# EAGLE board low-gain-radio (EAGLE 7.3.0)
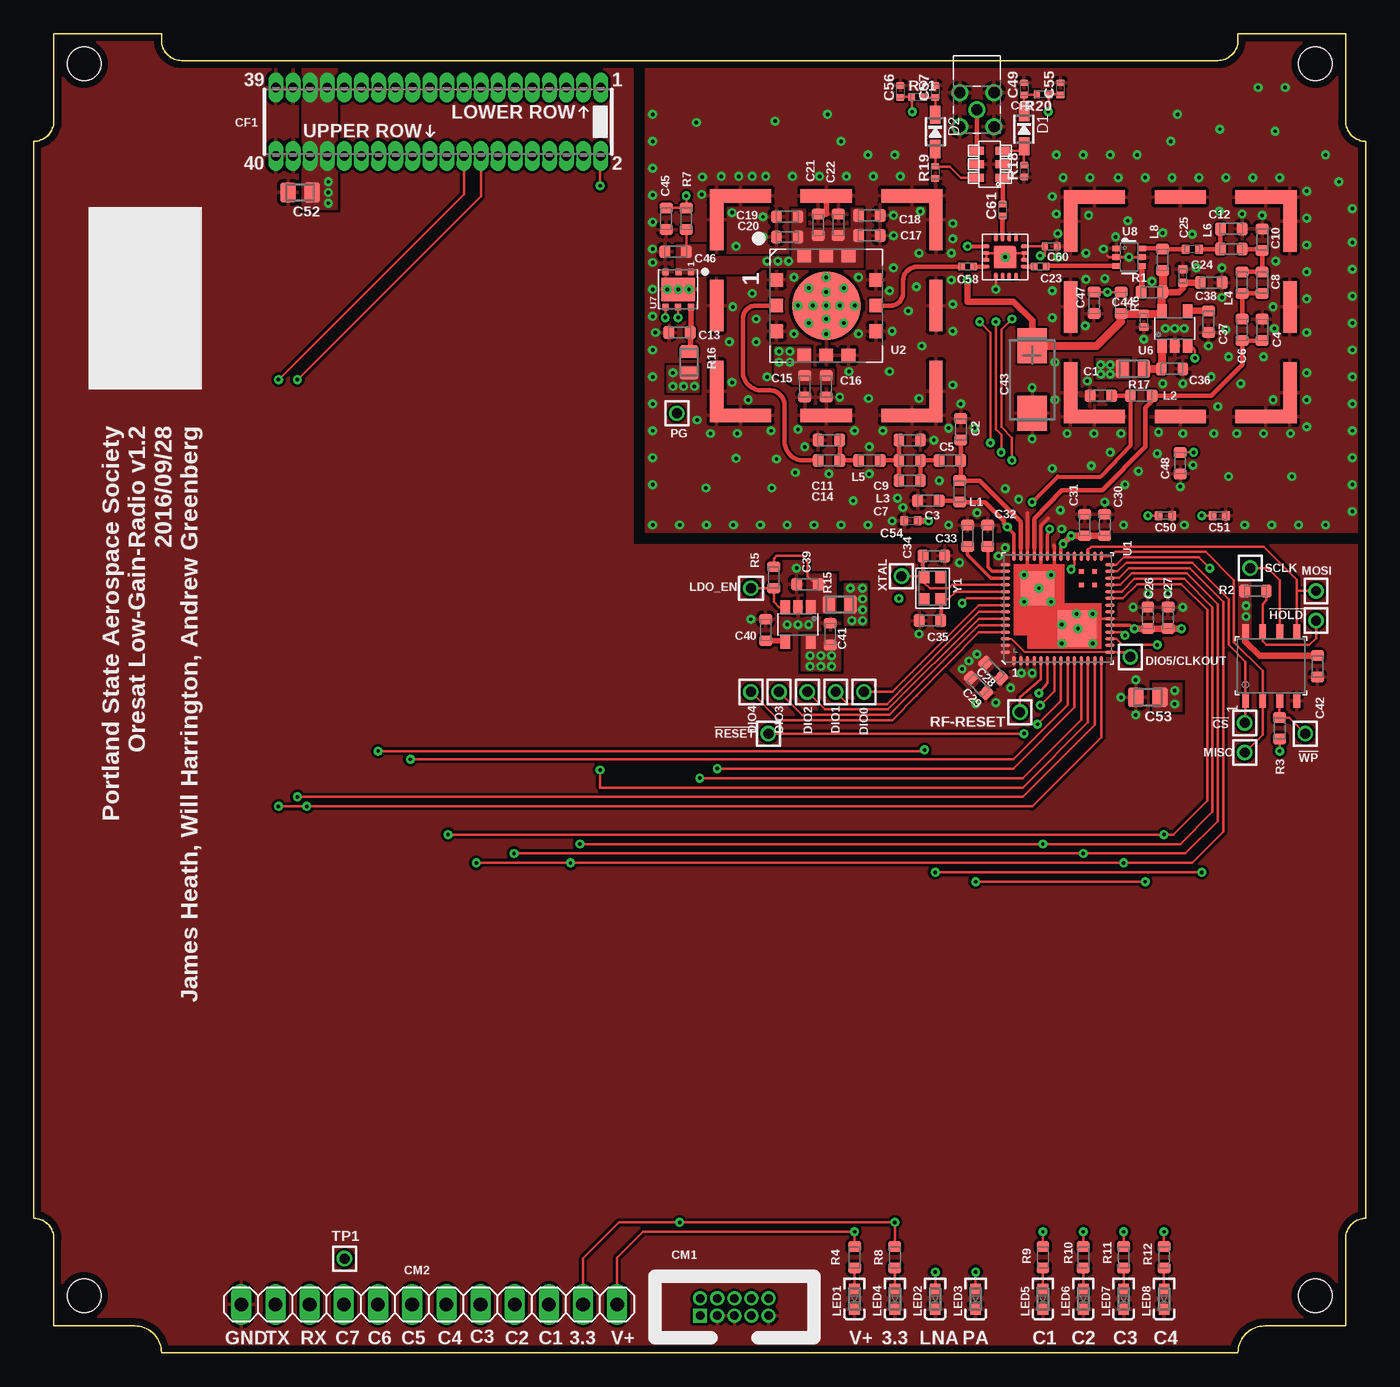
[diagram p0: board, top side]
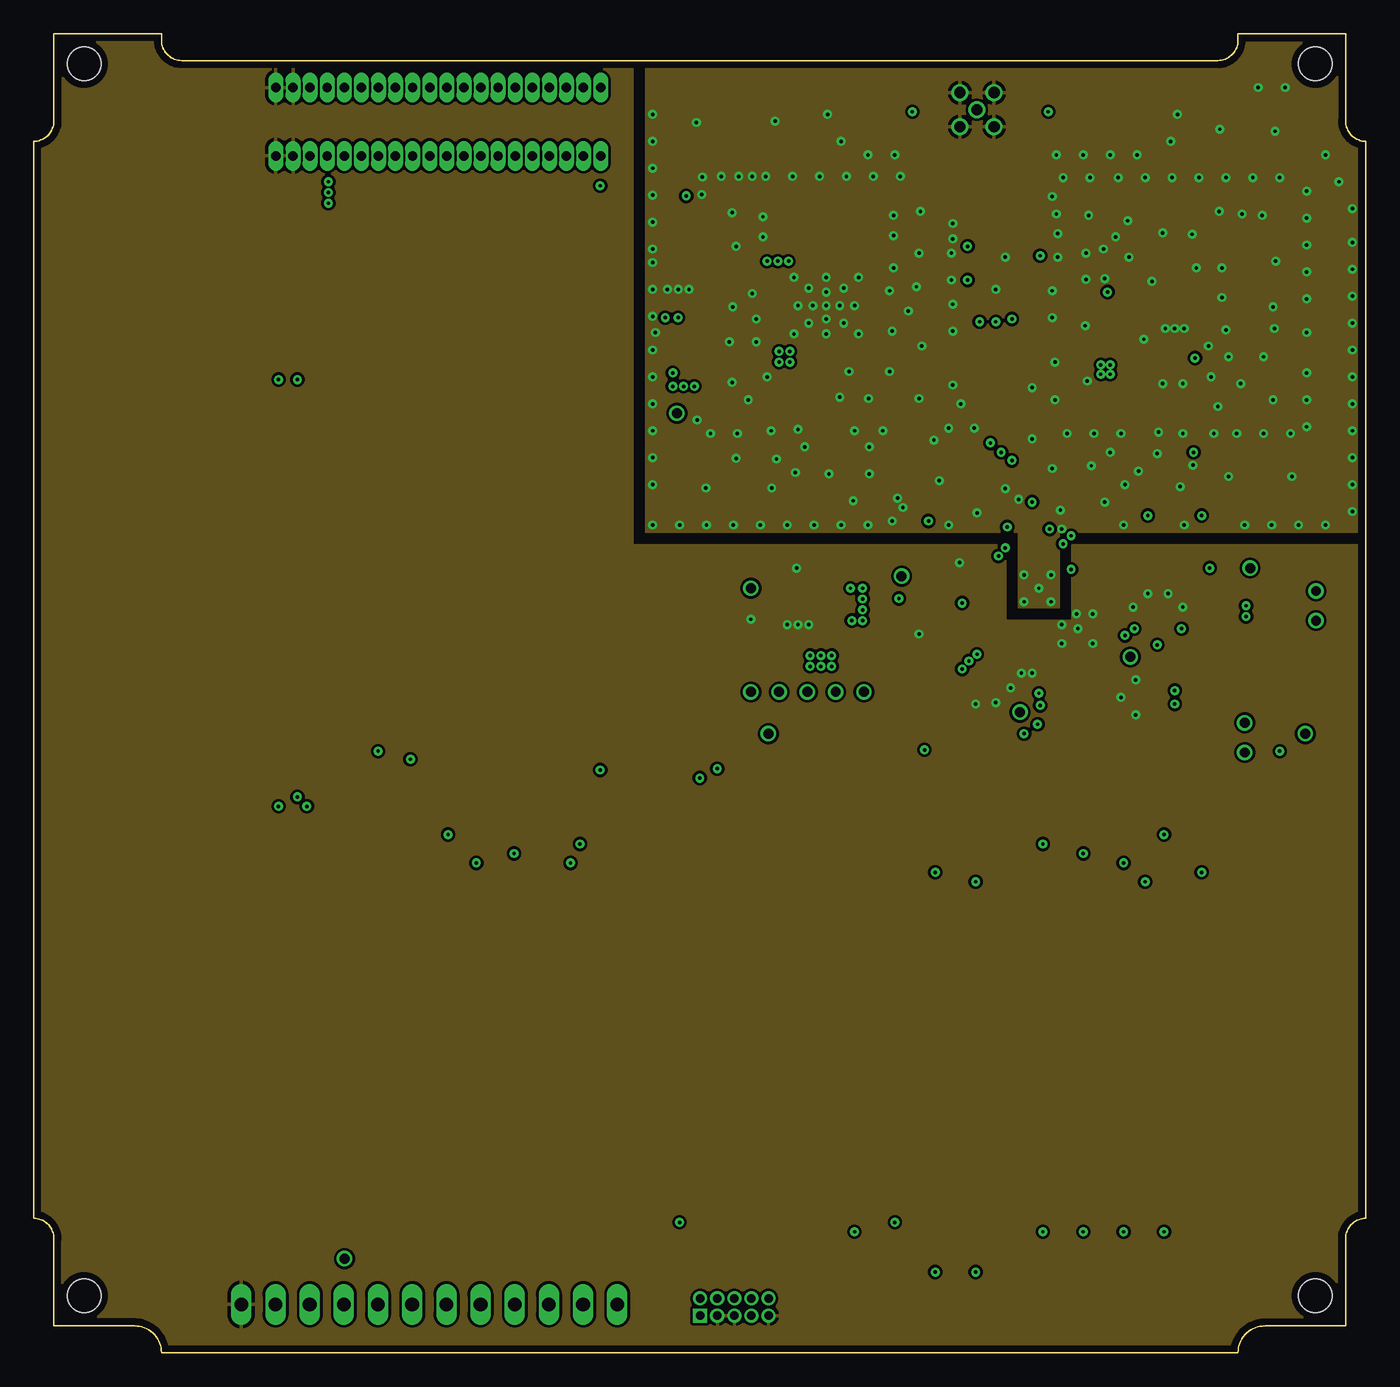
[diagram p1: board, inner layer Route2]
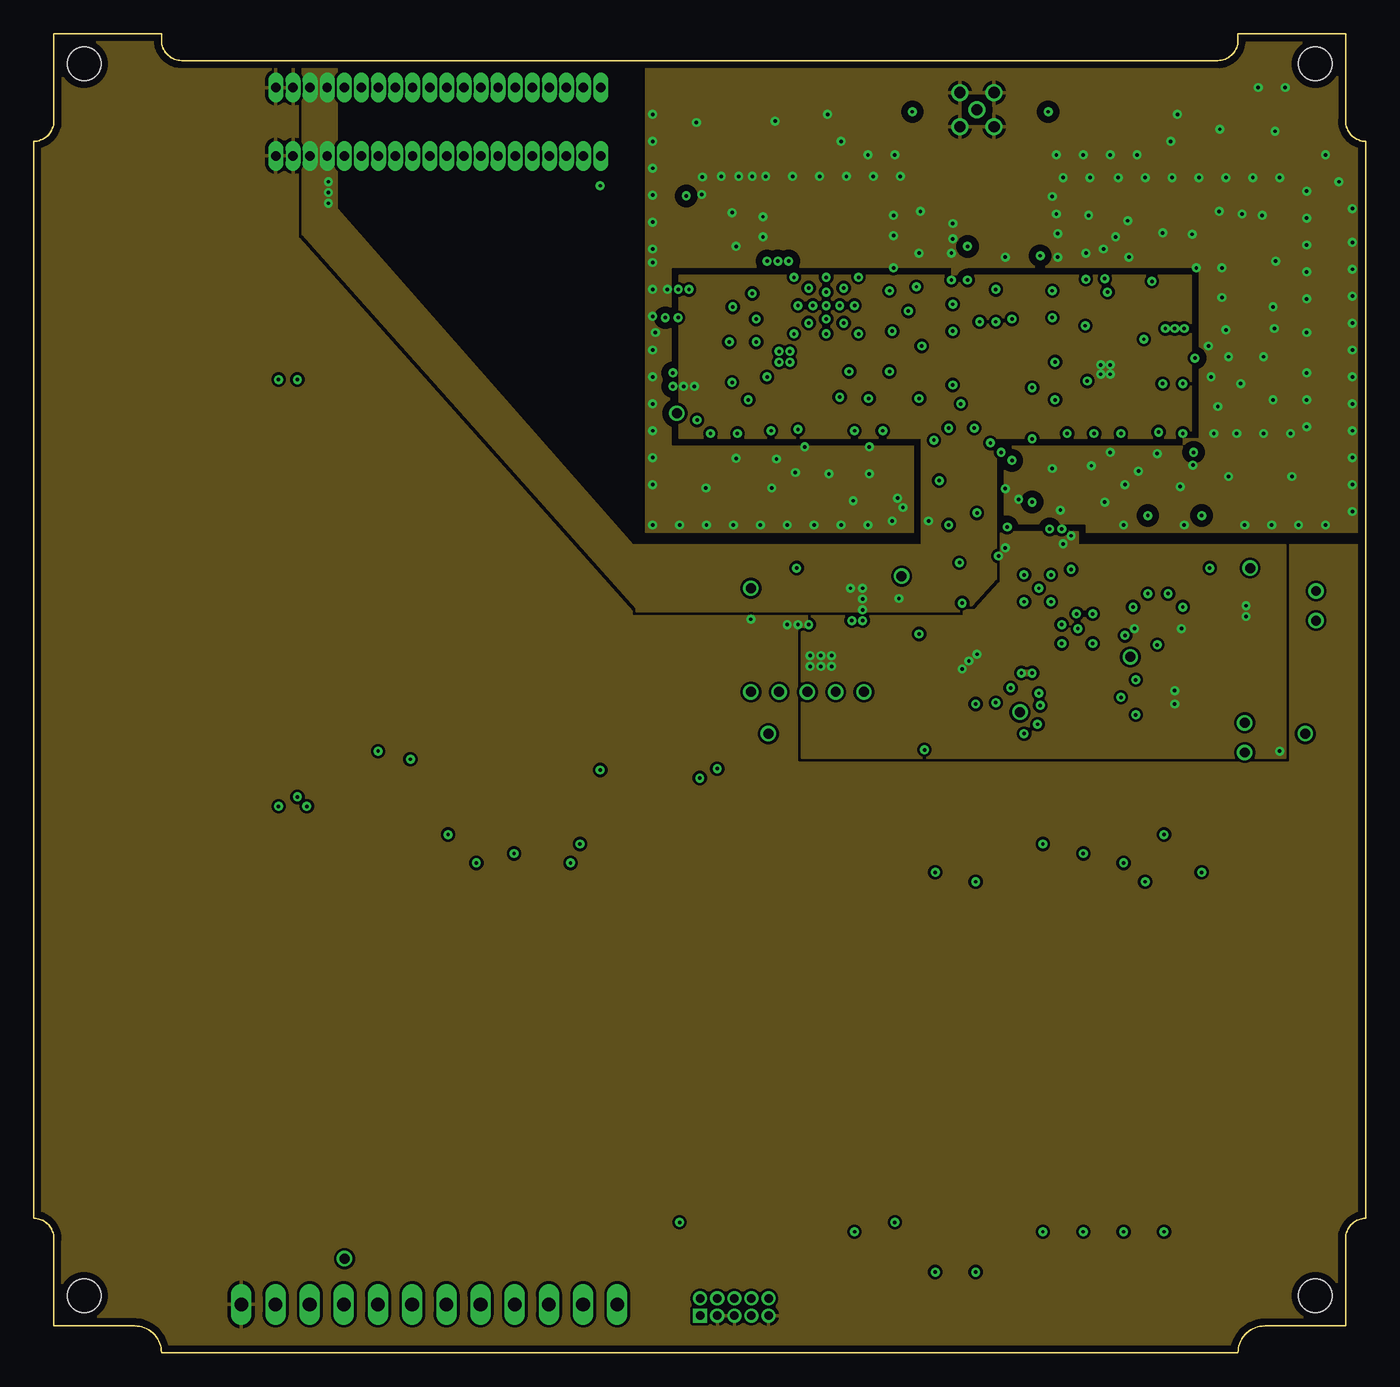
[diagram p2: board, inner layer Route15]
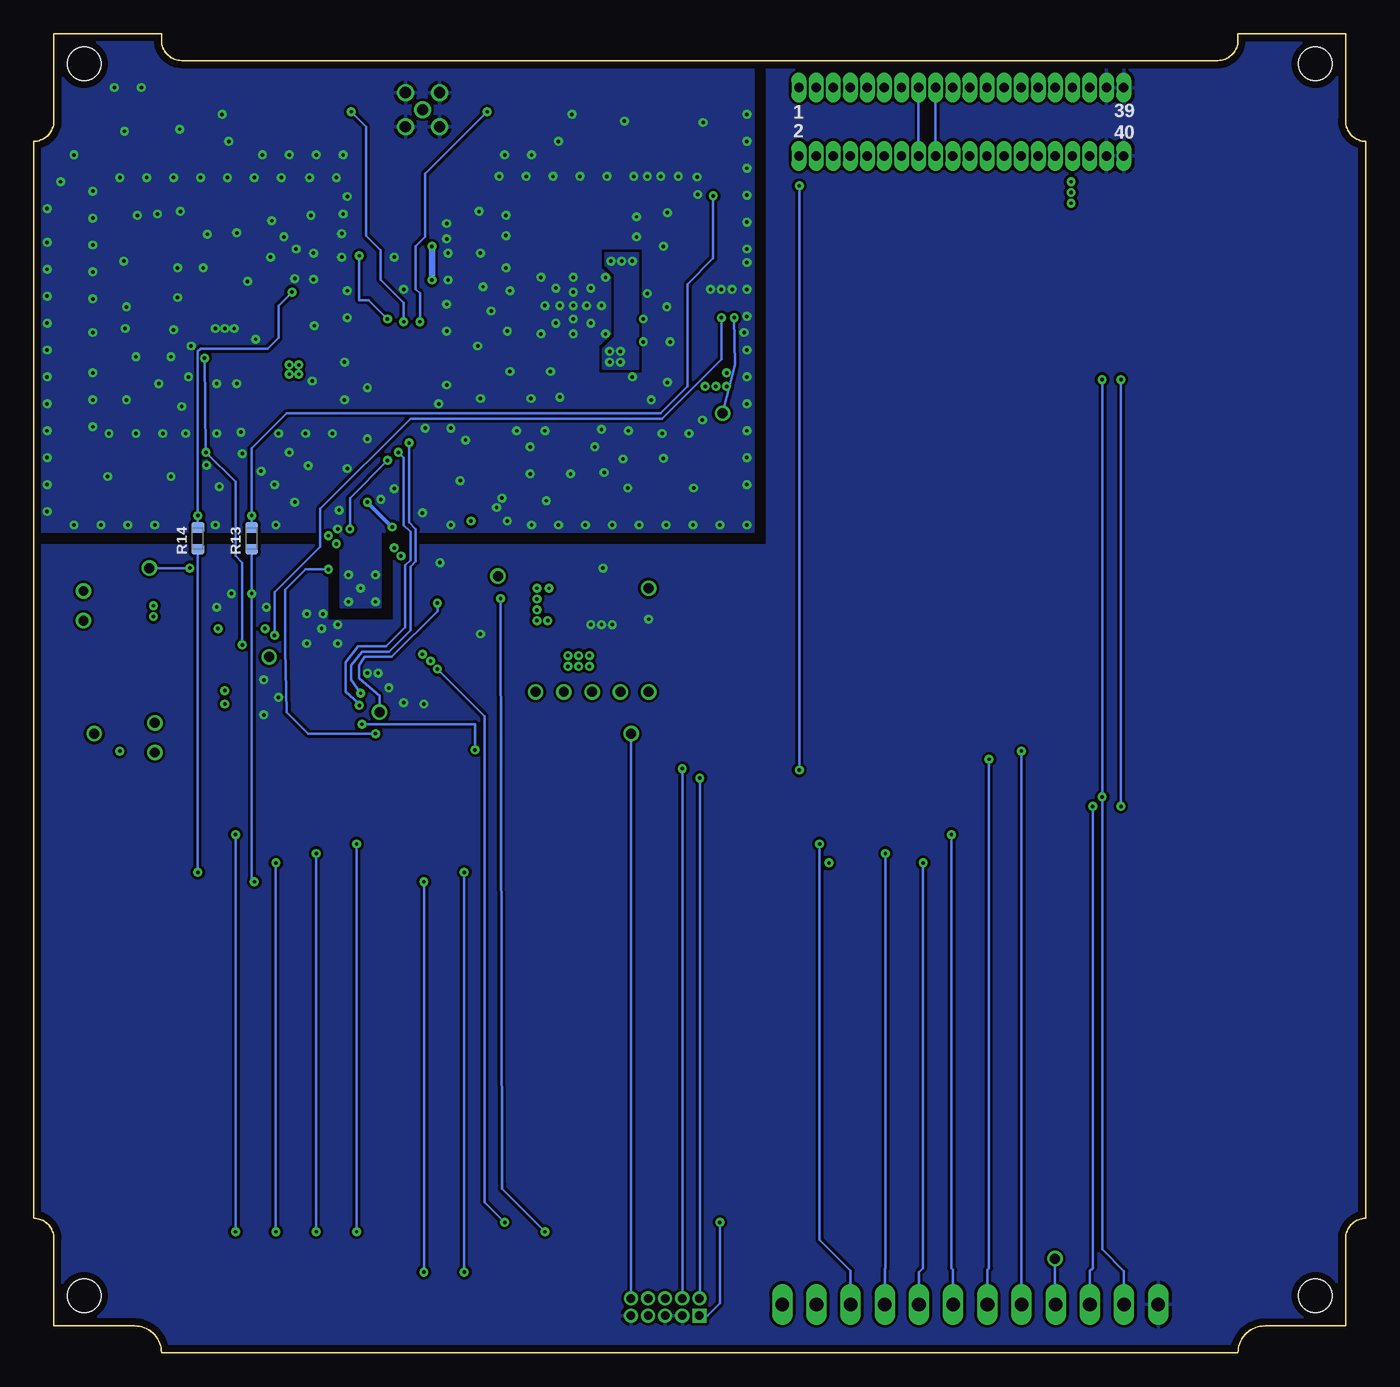
[diagram p3: board, bottom side, seen from below]

Size 99 x 98 mm. Coordinates in mm from the lower left corner, seen from the top.
Copper layers (1+2*15+16): Top 0.0178mm / dielectric 12mil / Route2 0.0356mm / dielectric 28mil / Route15 0.0356mm / dielectric 12mil / Bottom 0.0178mm
Design rules "sunstone-4Lyr_v1.0.0.3 *": minimum track width 6mil, minimum drill 10mil, track to track 6mil, track to pad 6mil, pad to pad 6mil, via to via 6mil, smd to smd 6mil, copper to edge 20mil, drill to drill 16mil, minimum pad ring 8mil, minimum via ring 8mil, stop-mask expansion 3mil, vias tented up to drill 11mil, thermal gap 10mil
Net classes: 1 RF: width 0.343 mm, clearance 0.4 mm
tRestrict: 6 lines

## Footprints (pad centres in the part's own frame; a part is rotated, then mirrored left to right if it is on the bottom)
2MM-TEST-POINT = drill 0.737: 1 0,0
.0603-B-NOSILK = smd 0.8 x 0.95: 1 -0.8,0; 2 0.8,0
.0402-C-NOSILK = smd 0.5 x 0.6: 1 -0.45,0; 2 0.45,0
.0402-B-NOSILK = smd 0.6 x 0.7: 1 -0.5,0; 2 0.5,0
CT6032 = smd 2.6 x 2.2: + -2.5,0; - 2.5,0
.0805-B-NOSILK = smd 1.15 x 1.45: 1 -0.9,0; 2 0.9,0
HARWIN-ARCHER-M50-3202045 = drill 0.7 pad 1.07 long: P$1 -12.065,-2.54; P$2 -12.065,2.54; P$3 -10.795,-2.54; P$4 -10.795,2.54; P$5 -9.525,-2.54; P$6 -9.525,2.54; P$7 -8.255,-2.54; P$8 -8.255,2.54; P$9 -6.985,-2.54; P$10 -6.985,2.54; P$11 -5.715,-2.54; P$12 -5.715,2.54; P$13 -4.445,-2.54; P$14 -4.445,2.54; P$15 -3.175,-2.54; P$16 -3.175,2.54; P$17 -1.905,-2.54; P$18 -1.905,2.54; P$19 -0.635,-2.54; P$20 -0.635,2.54; P$21 0.635,-2.54; P$22 0.635,2.54; P$23 1.905,-2.54; P$24 1.905,2.54; P$25 3.175,-2.54; P$26 3.175,2.54; P$27 4.445,-2.54; P$28 4.445,2.54; P$29 5.715,-2.54; P$30 5.715,2.54; P$31 6.985,-2.54; P$32 6.985,2.54; P$33 8.255,-2.54; P$34 8.255,2.54; P$35 9.525,-2.54; P$36 9.525,2.54; P$37 10.795,-2.54; P$38 10.795,2.54; P$39 12.065,-2.54; P$40 12.065,2.54
CON-MMCX-F-MOLEX-0734151001 = drill 0.84: CENTER 0,0; G1 -1.27,1.27; G2 -1.27,-1.27; G3 1.27,-1.27; G4 1.27,1.27
PINHEADER-2X5-0.05+POL+SILK = drill 0.635 pad 1.04 square: 1 -2.54,-0.635 | drill 0.635 pad 1.04: 2 -2.54,0.635; 3 -1.27,-0.635; 4 -1.27,0.635; 5 0,-0.635; 6 0,0.635; 7 1.27,-0.635; 8 1.27,0.635; 9 2.54,-0.635; 10 2.54,0.635
1X12 = drill 1.016 long: 1 -13.97,0; 2 -11.43,0; 3 -8.89,0; 4 -6.35,0; 5 -3.81,0; 6 -1.27,0; 7 1.27,0; 8 3.81,0; 9 6.35,0; 10 8.89,0; 11 11.43,0; 12 13.97,0
SOD-323 = smd 1.35 x 0.8: A 1.27,0; C -1.27,0
.0603-B-NOSILK@1 = smd 0.8 x 0.95: 1 -0.8,0; 2 0.8,0
LED-0603 = smd 0.8 x 0.8: A 0.75,0; K -0.75,0
.0805-C-NOSILK$1 = smd 0.95 x 1.35: 1 -0.8,0; 2 0.8,0
.0402-C-NOSILK$1 = smd 0.5 x 0.6: 1 -0.45,0; 2 0.45,0
BMI-S-202 = smd 1 x 4.55: P$1 -8.15,-6.375; P$7 -8.15,6.375; P$11 8.15,6.375; P$12 8.15,-6.375 | smd 4.55 x 1: P$2 -6.375,-8.15; P$8 6.375,-8.15; P$9 -6.375,8.15; P$10 6.375,8.15 | smd 1 x 3.8: P$3 -8.15,0; P$6 8.15,0 | smd 3.8 x 1: P$4 0,-8.15; P$5 0,8.15
MKW01Z128 = smd 0.711 x 0.254: 1 -3.878,3.25; 2 -3.878,2.75; 3 -3.878,2.25; 4 -3.878,1.75; 5 -3.878,1.25; 6 -3.878,0.75; 7 -3.878,0.25; 8 -3.878,-0.25; 9 -3.878,-0.75; 10 -3.878,-1.25; 11 -3.878,-1.75; 12 -3.878,-2.25; 13 -3.878,-2.75; 14 -3.878,-3.25; 29 3.878,-3.25; 30 3.878,-2.75; 31 3.878,-2.25; 32 3.878,-1.75; 33 3.878,-1.25; 34 3.878,-0.75; 35 3.878,-0.25; 36 3.878,0.25; 37 3.878,0.75; 38 3.878,1.25; 39 3.878,1.75; 40 3.878,2.25; 41 3.878,2.75; 42 3.878,3.25 | smd 0.254 x 0.711: 15 -3.25,-3.878; 16 -2.75,-3.878; 17 -2.25,-3.878; 18 -1.75,-3.878; 19 -1.25,-3.878; 20 -0.75,-3.878; 21 -0.25,-3.878; 22 0.25,-3.878; 23 0.75,-3.878; 24 1.25,-3.878; 25 1.75,-3.878; 26 2.25,-3.878; 27 2.75,-3.878; 28 3.25,-3.878; 43 3.25,3.878; 44 2.75,3.878; 45 2.25,3.878; 46 1.75,3.878; 47 1.25,3.878; 48 0.75,3.878; 49 0.25,3.878; 50 -0.25,3.878; 51 -0.75,3.878; 52 -1.25,3.878; 53 -1.75,3.878; 54 -2.25,3.878; 55 -2.75,3.878; 56 -3.25,3.878 | smd 0.356 x 0.356: 57 1.75,-1.75; 58 2.75,-1.75; 59 1.75,-2.75; 60 2.75,-2.75 | smd 2.5 x 2.5: PGND1 1.5,1.5 | smd 2.7 x 2.8: PGND2 -1.5,-1.42
SKY65116 = smd 0.993 x 1.01: 1 -3.697,1.91; 2 -3.697,0; 3 -3.697,-1.91; 7 3.697,-1.91; 8 3.697,0; 9 3.697,1.91 | smd 1.01 x 0.993: 4 -1.65,-3.697; 5 0,-3.697; 6 1.65,-3.697; 10 1.65,3.697; 11 0,3.697; 12 -1.65,3.697 | smd 5.08 x 5.08: CENTER 0,0
W25Q80DV = smd 0.51 x 1: 1 -1.945,-2.568; 2 -0.675,-2.568; 3 0.595,-2.568; 4 1.865,-2.568; 5 1.865,2.632; 6 0.595,2.632; 7 -0.675,2.632; 8 -1.945,2.632
SOT23-5 = smd 0.7 x 1: 1 0.95,1.3; 2 0,1.3; 3 -0.95,1.3; 4 -0.95,-1.3; 5 0.95,-1.3
LD39200 = smd 0.45 x 0.5: 1 -0.95,-1.3; 2 -0.02,-1.3; 3 0.95,-1.3; 4 0.95,1.3; 5 0,1.3; 6 -0.95,1.3 | smd 2.5 x 1.75: CENTER 0,0
SOT-363 = smd 0.42 x 0.6: 1 -0.65,-0.95; 2 0,-0.95; 3 0.65,-0.95; 4 0.65,0.95; 5 0,0.95; 6 -0.65,0.95
FV1206-1 = smd 0.61 x 1.07: FWD -1,0.861; GND 0,-1.06; GND2 0,0.861; IN -1,-1.06; OUT 1,0.861; REV 1,-1.06
ORESAT-CARD-RF-V0.4 = hole 2.5: 3.75,4.25; 95.25,4.25; 3.75,95.75; 95.25,95.75
QFN-16_3MMX3MM = smd 0.2 x 0.35: GND 0.8,1.4; GND1 0.3,1.4; GND2 -0.7,1.4; GND5 -0.7,-1.4; GND6 -0.2,-1.4; GND7 0.3,-1.4; GND8 0.8,-1.4; RFC -0.2,1.4 | smd 0.35 x 0.2: GND3 -1.4,0.3; GND4 -1.4,-0.2; GND9 1.4,-0.2; GND10 1.4,0.3; RF1 -1.4,-0.7; RF2 1.4,-0.7; VC 1.4,0.8; VDD -1.4,0.8 | smd 1.6 x 1.6: PADDLE 0,0
CRYSTAL_2.5X2 = smd 0.9 x 0.8: 1 -0.825,-0.625; 2 0.825,-0.625; 3 0.825,0.625; 4 -0.825,0.625

## Placement (x,y rotation side)
!CS  TEST-POINT  [2MM-TEST-POINT]  90,46.8 0 top
!HOLD  TEST-POINT  [2MM-TEST-POINT]  95.3,54.4 0 top
!RESET  TEST-POINT  [2MM-TEST-POINT]  54.6,46 0 top
!WP  TEST-POINT  [2MM-TEST-POINT]  94.5,46 0 top
C1  10nF  [.0603-B-NOSILK]  79.3,71.1 0 top
C2  12pF  [.0603-B-NOSILK]  68.9,68.6 90 top
C3  10nF  [.0603-B-NOSILK]  66.5,63.3 180 top
C4  12pF  [.0603-B-NOSILK]  91.3,76 90 top
C5  15pF  [.0603-B-NOSILK]  68.1,66.3 180 top
C6  15pF  [.0603-B-NOSILK]  89.8,76 90 top
C7  2.2pF  [.0603-B-NOSILK]  65.1,64.8 180 top
C8  2.2pF  [.0603-B-NOSILK]  91.3,79.5 90 top
C9  15pF  [.0603-B-NOSILK]  65.1,67.8 180 top
C10  15pF  [.0603-B-NOSILK]  91.3,82.7 270 top
C11  8.2pF  [.0603-B-NOSILK]  59.1,67.8 0 top
C12  8.2pF  [.0603-B-NOSILK]  89,83.5 180 top
C13  10uF  [.0603-B-NOSILK]  48,75.8 0 top
C14  100nF  [.0603-B-NOSILK]  59.1,66.3 0 top
C15  10uF  [.0603-B-NOSILK]  57.3,71.8 90 top
C16  10nF  [.0603-B-NOSILK]  58.9,71.8 90 top
C17  10uF  [.0603-B-NOSILK]  62.1,83 180 top
C18  10nF  [.0603-B-NOSILK]  62.1,84.5 180 top
C19  10uF  [.0603-B-NOSILK]  56,84.4 0 top
C20  10nF  [.0603-B-NOSILK]  56,82.9 0 top
C21  10nF  [.0603-B-NOSILK]  58.3,83.8 270 top
C22  10uF  [.0603-B-NOSILK]  59.8,83.8 270 top
C23  100pF  [.0402-C-NOSILK]  74.8,80.7 180 top
C24  1nF  [.0402-B-NOSILK]  85.4,80 90 top
C25  1nF  [.0402-B-NOSILK]  86.1,82 180 top
C26  100nF  [.0603-B-NOSILK]  82.8,54.6 90 top
C27  100nF  [.0603-B-NOSILK]  84.3,54.6 90 top
C28  100nF  [.0603-B-NOSILK]  71.3,50.7 135 top
C29  100nF  [.0603-B-NOSILK]  70.2,49.6 135 top
C30  100nF  [.0603-B-NOSILK]  79.6,61.5 270 top
C31  100nF  [.0603-B-NOSILK]  78.1,61.5 270 top
C32  100nF  [.0603-B-NOSILK]  70.9,60.7 270 top
C33  100nF  [.0603-B-NOSILK]  69.4,60.7 270 top
C34  6pF  [.0603-B-NOSILK]  66.9,59.2 180 top
C35  6pF  [.0603-B-NOSILK]  66.61,54.4 0 top
C36  1uF  [.0603-B-NOSILK]  84.6,73.1 180 top
C37  10nF  [.0603-B-NOSILK]  87.3,76.6 90 top
C38  10uF  [.0603-B-NOSILK]  87.5,79.5 180 top
C39  1uF  [.0603-B-NOSILK]  57.5,57.1 0 top
C40  10nF  [.0603-B-NOSILK]  54.4,53.7 270 top
C41  10uF  [.0603-B-NOSILK]  59.2,53.4 270 top
C42  100nF  [.0603-B-NOSILK]  95.4,51 90 top
C43  100uF  [CT6032]  74.2,72.3 270 top
C44  10nF  [.0402-B-NOSILK]  82.5,76.7 270 top
C45  100nF  [.0603-B-NOSILK]  47,84.25 90 top
C46  10uF  [.0603-B-NOSILK]  47.7,81.8 0 top
C47  100nF  [.0603-B-NOSILK]  78.8,78 90 top
C48  100nF  [.0603-B-NOSILK]  85.2,66.1 90 top
C49  47nF  [.0402-C-NOSILK]  73.6,93.9 90 top
C50  10nF  [.0402-B-NOSILK]  84.1,62.2 180 top
C51  10nF  [.0402-B-NOSILK]  88.1,62.2 180 top
C52  10 uF  [.0805-B-NOSILK]  19.8,86.2 180 top
C53  10 uF  [.0805-B-NOSILK]  82.8,48.7 180 top
C54  10nF  [.0402-B-NOSILK]  65.2,61.8 0 top
C55  47nF  [.0402-C-NOSILK]  76.3,93.9 90 top
C56  47nF  [.0402-C-NOSILK]  64.4,93.7 90 top
C57  47nF  [.0402-C-NOSILK]  67,93.7 90 top
C58  100pF  [.0402-C-NOSILK]  69.4,80.7 0 top
C60  100pF  [.0402-C-NOSILK]  75.6,82.2 180 top
C61  100pF  [.0402-C-NOSILK]  72,84.9 90 top
CF1  ORESAT-CONNECTOR-40PIN  [HARWIN-ARCHER-M50-3202045]  30.07,91.46 180 top
CF2  CON-MMCX-F-MOLEX-0734151001  [CON-MMCX-F-MOLEX-0734151001]  70.1,92.35 0 top
CM1  3220-10-0100-00  [PINHEADER-2X5-0.05+POL+SILK]  52.07,3.41 0 top
CM2  DNP  [1X12]  29.4,3.6 180 top
D1  1N5711WS  [SOD-323]  73.6,90.9 270 top
D2  1N5711WS  [SOD-323]  67,90.7 270 top
DIO0  TEST-POINT  [2MM-TEST-POINT]  61.7,49.1 0 top
DIO1  TEST-POINT  [2MM-TEST-POINT]  59.6,49.1 0 top
DIO2  TEST-POINT  [2MM-TEST-POINT]  57.5,49.1 0 top
DIO3  TEST-POINT  [2MM-TEST-POINT]  55.4,49.1 0 top
DIO4  TEST-POINT  [2MM-TEST-POINT]  53.3,49.1 0 top
DIO5/CLKOUT  TEST-POINT  [2MM-TEST-POINT]  81.5,51.7 0 top
L1  22nH  [.0603-B-NOSILK@1]  68.8,64 90 top
L2  22nH  [.0603-B-NOSILK@1]  82.3,71.1 0 top
L3  15nH  [.0603-B-NOSILK@1]  65.1,66.3 180 top
L4  15nH  [.0603-B-NOSILK@1]  89.8,79.5 90 top
L5  15nH  [.0603-B-NOSILK@1]  62.1,66.3 180 top
L6  15nH  [.0603-B-NOSILK@1]  89,82 180 top
L8  82nH  [.0603-B-NOSILK@1]  83.9,81.2 270 top
LDO_EN  TEST-POINT  [2MM-TEST-POINT]  53.3,56.8 270 top
LED1  DNP/GRN  [LED-0603]  61,4 90 top
LED2  DNP/GRN  [LED-0603]  67,4 90 top
LED3  DNP/GRN  [LED-0603]  70,4 90 top
LED4  DNP/GRN  [LED-0603]  64,4 90 top
LED5  DNP/AMB  [LED-0603]  75,4 90 top
LED6  DNP/AMB  [LED-0603]  78,4 90 top
LED7  DNP/AMB  [LED-0603]  81,4 90 top
LED8  DNP/AMB  [LED-0603]  84,4 90 top
MISO  TEST-POINT  [2MM-TEST-POINT]  90,44.6 0 top
MOSI  TEST-POINT  [2MM-TEST-POINT]  95.3,56.6 0 top
PG  TEST-POINT  [2MM-TEST-POINT]  47.8,69.8 0 top
R1  250  [.0603-B-NOSILK@1]  83.1,78.8 0 top
R2  10k  [.0603-B-NOSILK@1]  90.8,56.6 180 top
R3  10k  [.0603-B-NOSILK@1]  92.6,46.4 270 top
R4  DNP/1k  [.0603-B-NOSILK@1]  61,7.1 90 top
R5  10k  [.0603-B-NOSILK@1]  55,57.6 90 top
R6  DNP/1k  [.0603-B-NOSILK@1]  80.8,78 270 top
R7  DNP/1k  [.0603-B-NOSILK@1]  48.5,84.25 270 top
R8  DNP/1k  [.0603-B-NOSILK@1]  64,7.1 90 top
R9  DNP/1k  [.0603-B-NOSILK@1]  75,7.1 90 top
R10  DNP/1k  [.0603-B-NOSILK@1]  78,7.1 90 top
R11  DNP/1k  [.0603-B-NOSILK@1]  81,7.1 90 top
R12  DNP/1k  [.0603-B-NOSILK@1]  84,7.1 90 top
R13  DNP/0  [.0603-B-NOSILK@1]  82.8,60.5 90 bottom
R14  DNP/0  [.0603-B-NOSILK@1]  86.8,60.5 90 bottom
R15  0  [.0805-C-NOSILK$1]  59.9,55.6 0 top
R16  0  [.0805-C-NOSILK$1]  48.7,73.6 270 top
R17  0  [.0805-C-NOSILK$1]  81.7,73.1 180 top
R18  51  [.0402-C-NOSILK$1]  73.6,87.8 90 top
R19  51  [.0402-C-NOSILK$1]  67,87.7 90 top
R20  20k  [.0402-C-NOSILK$1]  75,93.5 180 top
R21  20k  [.0402-C-NOSILK$1]  65.7,93.3 0 top
RF-RESET  TEST-POINT  [2MM-TEST-POINT]  73.3,47.6 0 top
SCLK  TEST-POINT  [2MM-TEST-POINT]  90.4,58.3 0 top
SH1  BMI-S-202-SHIELD  [BMI-S-202]  85.2,77.7 0 top
SH2  BMI-S-202-SHIELD  [BMI-S-202]  58.9,77.8 0 top
TP1  TEST-POINT  [2MM-TEST-POINT]  23.1,7 0 top
U1  MKW01Z128  [MKW01Z128]  76.1,55.3 90 top
U2  SKY65116  [SKY65116]  58.9,77.8 0 top
U3  W25Q80DV  [W25Q80DV]  92,51 0 top
U4  LP5907MFX-3.3  [SOT23-5]  56.8,54.1 0 top
U6  LP5907MFX-3.3  [SOT23-5]  84.8,76.1 180 top
U7  LD39200  [LD39200]  47.9,79 180 top
U8  MAAL-010704  [SOT-363]  81.4,81.4 270 top
U$22  BDCN-20-13+  [FV1206-1]  70.95,88.3 90 top
U$35  [ORESAT-CARD-RF-V0.4]  0,0 0 top
U$49  RF3025  [QFN-16_3MMX3MM]  72.2,81.4 0 top
XTAL  TEST-POINT  [2MM-TEST-POINT]  64.5,57.7 0 top
Y1  32MHz  [CRYSTAL_2.5X2]  66.8,56.8 270 top

## Library data of the parts
!CS !HOLD !RESET !WP DIO0 DIO1-DIO4 DIO5/CLKOUT LDO_EN MISO MOSI PG RF-RESET SCLK TP1 XTAL = Tova
C1 C3 C16 C18 C20 C21 C37 C40 = rcl_custom; DIST: Digi-Key; DPN: 490-1512-2-ND; MFG: Murata; MFG_PN: GRM188R71H103KA01D
C2 C4 = rcl_custom; DIST: Digi-Key; DPN: 490-1405-2-ND; MFG: Murata; MFG_PN: GRM1885C1H120JA01D
C5 C6 C9 C10 = rcl_custom; DIST: Digi-Key; DPN: 490-1407-2-ND; MFG: Murata; MFG_PN: GRM1885C1H150JA01D
C7 C8 = rcl_custom; DIST: Digi-Key; DPN: 490-9668-2-ND; MFG: Murata; MFG_PN: GRM1885C1H2R2CA01D
C11 C12 = rcl_custom; DIST: Digi-Key; DPN: 06031U8R2BAT2A-ND; MFG: AVX; MFG_PN: 06031U8R2BAT2A
C13 C15 C17 C19 C22 C38 C41 C46 C53 = rcl_custom; DIST: Digi-Key; DPN: 490-6405-2-ND; MFG: Murata; MFG_PN: GRM188R60J106ME47J
C14 C26-C33 C42 C45 C47 C48 = rcl_custom; DIST: Digi-Key; DPN: 478-5778-1-ND; MFG: AVX; MFG_PN: 06035C104JAT2A
C23 C58 C60 C61 = low-gain-radio; DIST: Digi-Key Inc.; DPN: 399-11246-2-ND; MFG: Kemet; MPN: CBR04C101F3GAC
C24 C25 C50 C51 C54 = rcl_custom; DIST: Digi-key; DPN: 490-1303-1-ND; MFG: Murata; MFG_PN: GRM155R71H102KA01D
C34 C35 = rcl_custom; DIST: Digi-Key; DPN: GQM1875C2E6R0BB12D-ND; MFG: Murata; MFG_PN: GQM1875C2E6R0BB12D
C36 C39 = rcl_custom; DIST: Digi-Key; DPN: 490-1543-2-ND; MFG: Murata; MFG_PN: GRM188R61A105KA61D
C43 = rcl; DIST: Digi-Key; DPN: 478-1704-1-ND; MFG: AVX; MFG_PN: TAJC107K010RNJ
C44 = rcl_custom; DIST: Digi-key; DPN: 490-4516-1-ND; MFG: Murata; MFG_PN: GRM155R71H103KA88D
C49 C55-C57 = low-gain-radio; DIST: Digi-Key Inc.; DPN: 587-1068-1-ND; MFG: Taiyo Yuden; MPN: LMK105SD472KV-F
C52 = rcl_custom
CF1 CF2 U$35 = oresat-eagle
CM1 = low-gain-radio; DIST: Digi-Key; DPN: 1175-1627-ND; MFG: CNC Tech; MFG_PN: 3220-10-0100-00
CM2 = pinhead
D1 D2 = microbuilder; DIST: Digi-Key Inc.; DPN: 1N5711WS-FDICT-ND; MFG: Diodes Incorporated; MPN: 1N5711WS
L1 L2 = rcl_custom; DIST: Digi-Key; DPN: 490-6874-1-ND; MFG: Murata; MFG_PN: LQW18AN22NG00D
L3-L6 = rcl_custom; DIST: Digi-Key; DPN: 490-6866-1-ND; MFG: Murata; MFG_PN: LQW18AN15NG00D
L8 = rcl_custom; DIST: Digi-Key; DPN: 490-6912-2-ND; MFG: Murata; MFG_PN: LQW18AN82NG00D
LED1-LED4 = psas_c3_team05; DIST: Digi-Key; DPN: 160-1446-1-ND; MFG: Lite-On Inc.; MFG_PN: LTST-C191KGKT
LED5-LED8 = psas_c3_team05; DIST: Digi-Key; DPN: 160-1440-1-ND; MFG: Lite-On Inc.; MFG_PN: LTST-C191AKT
R1 = rcl_custom; DIST: Digi-Key; DPN: 1276-4592-2-ND; MFG: Samsung; MFG_PN: RC1608F2490CS
R2 R3 R5 = rcl_custom; DIST: Digi-Key; DPN: 311-10.0KHRCT-ND; MFG: Yageo; MFG_PN: RC0603FR-0710KL
R4 R6-R12 = rcl_custom; DIST: Digi-Key; DPN: 311-1.00KHRCT-ND; MFG: Yageo; MFG_PN: RC0603FR-071KL
R13 R14 = rcl_custom; DIST: Digi-Key; DPN: 311-0.0GRTR-ND; MFG: Yageo; MFG_PN: RC0603JR-070RL
R15-R17 = low-gain-radio; DIST: Digi-Key Inc.; DPN: 311-0.0ARCT-ND; MFG: Yageo; MPN: RC0805JR-070RL
R18 R19 = low-gain-radio; DIST: Digi-Key Inc.; DPN: 311-51.0LRCT-ND; MFG: Yageo; MPN: RC0402FR-0751RL
R20 R21 = low-gain-radio; DIST: Digi-Key Inc.; DPN: YAG1389CT-ND; MFG: Yageo; MPN: RT0402BRD0721KL
SH1 SH2 = hw-laird-bmi-s-202
U1 = psas_c3_team05; DIST: Digi-Key; DPN: MKW01Z128CHN-ND; MFN: NXP; MPN: MKW01Z128CHN
U2 U8 = psas_c3_team05
U3 = psas_c3_team05; DIST: Digi-Key; DPN: W25Q80DVSSIG-ND; MFG: Winbond Electronics; MFG_PN: W25Q80DVSSIG
U4 U6 = psas_c3_team05; DIST: Digi-Key; DPN: 296-38557-1-ND; MFN: Texas Instruments; MFN-PN: LP5907MFX-3.3
U7 = psas_c3_team05; DIST: Digi-Key; DPN: 497-15229-2-ND; MFG: STMicroelectronics; MFG_PN: LD39200PU33R
U$22 = low-gain-radio; MFG: Mini-Circuits; MPN: BDCN-20-13+
U$49 = low-gain-radio; DIST: Digi-Key Inc.; DPN: 689-1087-1-ND; MFG: RFMD; MPN: RF3025TR7
Y1 = microbuilder; DIST: Digi-Key; DPN: SER4044CT-ND; MFN: EPSON; MPN: FA20H 32.0000MF12Y-W3

## Nets
3.3V: C26.1 C27.1 C28.2 C29.2 C30.2 C31.2 C41.2 C42.2 C53.1 CM1.1 CM2.2 R2.2 R3.2 R8.2 U1.1 U1.19 U1.35 U1.43 U1.55 U1.56 U3.8 U4.5
!CS: !CS.1 U1.27 U3.1
!HOLD: !HOLD.1 R2.1 U3.7
!RESET: !RESET.1 CM1.10 U1.33
!WP: !WP.1 R3.1 U3.3
BYPASS: C37.2 U6.4
DC_OUT: CF2.CENTER U$22.OUT
DIO0: DIO0.1 U1.49
DIO1: DIO1.1 U1.50
DIO2: DIO2.1 U1.51
DIO3: DIO3.1 U1.52
DIO4: DIO4.1 U1.53
DIO5/CLKOUT: DIO5/CLKOUT.1 U1.15 U1.54
FWD: D2.A R19.2 U$22.FWD
GND: C26.2 C27.2 C28.1 C29.1 C34.1 C35.1 C39.1 C40.1 C41.1 C42.1 C52.2 C53.2 CF1.P$37 CF1.P$38 CF1.P$39 CF1.P$40 CM1.3 CM1.5 CM1.9 CM2.12 LED1.K LED2.K LED3.K LED4.K LED5.K LED6.K LED7.K LED8.K U1.2 U1.3 U1.4 U1.20 U1.PGND2 U3.4 U4.2
LDO_EN: LDO_EN.1 R5.1 U4.3
LNA_EN: C48.2 U1.17 U6.3
LNA_IN [RF]: C23.2 U$49.RF2
LNA_OUT [RF]: C12.2 C25.1 L6.2
MISO: MISO.1 U1.29 U3.2
MOSI: MOSI.1 U1.31 U3.5
N$1: LED3.A R13.1
N$2: R1.1 U8.4
N$3: LED2.A R14.1
N$4: PG.1 U7.4
N$5: CM2.9 TP1.1
N$6: C13.2 R16.1 U7.6
N$7 [RF]: C25.2 L8.1 U8.6
N$8: C35.2 U1.47 Y1.3
N$9: C36.2 R17.1 U6.1
N$10 [RF]: C5.2 C7.1 L3.1
N$12: C39.2 R5.2 R15.1 U4.1
N$13: C40.2 U4.4
N$14: LED1.A R4.1
N$15: LED5.A R9.1
N$16 [RF]: C7.2 C9.2 L3.2 L5.1
N$17 [RF]: C11.2 C14.2 L5.2
N$18 [RF]: C6.2 C8.1 L4.1
N$19 [RF]: C8.2 C10.2 L4.2 L6.1
N$20: LED6.A R10.1
N$21: LED7.A R11.1
N$22: LED4.A R8.1
N$23: LED8.A R12.1
N$24: C49.1 D1.C R20.2
N$25 [RF]: C23.1 U8.3
N$28: C57.1 D2.C R21.2
N$31: C32.2 U1.44
N$34: C33.2 U1.45
N$43 [RF]: C14.1 U2.2
PA_BOOST [RF]: C2.1 C5.1 L1.2 U1.41
PA_EN: U1.18 U7.5
PA_IN [RF]: C58.2 U$49.RF1
PTA4/NMI_B: CF1.P$2 U1.12
PTC1: CM2.3 R9.2 U1.24
PTC2: CM2.4 R10.2 U1.25
PTC3: CM2.5 R11.2 U1.26
PTC4: CM2.6 R12.2 U1.23
PTE19: CM2.8 U1.8
PTE30: CM2.7 U1.9
REV: D1.A R18.2 U$22.REV
RF_GND: C1.1 C2.2 C3.2 C4.2 C9.1 C10.1 C11.1 C12.1 C13.1 C15.1 C16.1 C17.1 C18.1 C19.1 C20.1 C21.1 C22.1 C24.2 C30.1 C31.1 C32.1 C33.1 C36.1 C37.1 C38.1 C43.- C44.2 C45.1 C46.1 C47.1 C48.1 C49.2 C50.1 C51.1 C54.1 C55.2 C56.2 C57.2 C60.1 CF2.G1 CF2.G2 CF2.G3 CF2.G4 R18.1 R19.1 SH1.P$1 SH1.P$2 SH1.P$3 SH1.P$4 SH1.P$5 SH1.P$6 SH1.P$7 SH1.P$8 SH1.P$9 SH1.P$10 SH1.P$11 SH1.P$12 SH2.P$1 SH2.P$2 SH2.P$3 SH2.P$4 SH2.P$5 SH2.P$6 SH2.P$7 SH2.P$8 SH2.P$9 SH2.P$10 SH2.P$11 SH2.P$12 U1.36 U1.38 U1.40 U1.PGND1 U2.1 U2.3 U2.5 U2.6 U2.7 U2.9 U2.CENTER U6.2 U7.3 U7.CENTER U8.1 U8.2 U8.5 U$22.GND U$22.GND2 U$49.GND U$49.GND1 U$49.GND2 U$49.GND3 U$49.GND4 U$49.GND5 U$49.GND6 U$49.GND7 U$49.GND8 U$49.GND9 U$49.GND10 U$49.PADDLE
RF_RESET: RF-RESET.1 U1.5 U1.48
RFC: C61.2 U$22.IN
RFIO [RF]: C4.1 C6.1 L2.2 U1.39
RFOUT [RF]: C58.1 U2.8
RXTX: C60.2 U1.37 U$49.VC
RXTX_OUT: C61.1 U$49.RFC
SCLK: SCLK.1 U1.28 U3.6
SWD_CLK: CM1.4 U1.10
SWD_DIO: CM1.2 U1.11
UART0_RX: CF1.P$17 CF1.P$18 CM2.10 U1.14
UART0_TX: CF1.P$15 CF1.P$16 CM2.11 U1.13
V+: C52.1 C54.2 CF1.P$33 CF1.P$34 CF1.P$35 CF1.P$36 CM2.1 R4.2 R15.2 R16.2 R17.2
V_LNA_FILTERED: C47.2 C51.2 R6.1 R14.2
V_PA_FILTERED: C45.2 C50.2 R7.1 R13.2
VBIAS: C24.1 C38.2 C43.+ C44.1 L8.2 R1.2 R6.2 U6.5 U$49.VDD
VFWD: C56.1 R21.1 U1.6
VPA: C15.2 C16.2 C17.2 C18.2 C19.2 C20.2 C21.2 C22.2 C46.2 R7.2 U2.4 U2.10 U2.11 U2.12 U7.1 U7.2
VR_PA: C1.2 C3.1 L1.1 L2.1 U1.42
VREV: C55.1 R20.1 U1.7
XTA: C34.2 U1.46 XTAL.1 Y1.1

## Tracks (layer width: path | path; a pad name or v marks a point on that pad's centre or on a via)
3.3V  (via drill 0.25)
  Top 0.2: R8.2 v64,9.7 v48,9.7 43.5,9.7 40.83,7.03 CM2.2 | 76.35,59.95 v76.5,60.1 | v92.6,44.7 R3.2
  Top 0.25: U1.35 76.35,59.95 | U1.19 81.45,54.05 v81.8,53.8 81.9,53.8
  Top 0.5: v76.5,60.1 v77.1,60.7 C31.2 C30.2 | C42.2 91.1,51.8 90.06,52.84 U3.8 | 81.9,53.8 C26.1 C27.1 v85.3,53.8
  Bottom 0.2: v64,9.7 65.5,11.2 65.5,47.3 v69,50.8 | CM1.1 48.92,2.77 48,3.7 v48,9.7
  other vias: 90.1,54.7 57.7,51.8 58.5,51 57.7,51 58.5,51.8 59.3,51 69.5,51.4 70.1,51.9 90.1,55.5 84.8,49.2 84.8,48.2 59.3,51.8 71.7,59.2 72.2,59.8
  pour Route15 (isolate 0.2, rank 3, no thermals): 57.1,60 71.7,60 71.7,60.95 77.6,60.95 77.6,60 93,60 93,44.2 57.1,44.2
  pour Top (no thermals): 90.4,53.1 90.4,57.35 89.6,57.35 89.6,53.1
  pour Top (no thermals): 59.9,53.3 57.1,53.3 57.1,50.7 59.9,50.7
  pour Top (no thermals): 72.9,51 71.4,51 69.8,49.4 69.4,49.4 68.1,50.7 70,52.6 72.9,52.6
  pour Top (isolate 0.2, no thermals): 83.2,47.7 83.2,49.7 85.3,49.7 85.3,47.7
  pour Top (no thermals): 72.5,58.5 72.5,60.1 71.4,60.1 71.4,58.5
!CS
  Top 0.2: U1.27 80.55,58.05 81.2,58.7 86.1,58.7 88.8,56 88.8,52.6 90.06,51.34 U3.1 90.06,46.85 !CS.1
!HOLD
  Top 0.2: R2.1 91.6,55.9 91.33,55.62 U3.7 91.33,52.88 91.6,52.6 94.8,52.6 95.3,53.1 !HOLD.1
!RESET  (via drill 0.25)
  Top 0.2: U1.33 77.35,58.55 v77.1,58.2 | v73.6,46 !RESET.1
  Bottom 0.2: 54.6,4.1 54.61,4.09 CM1.10 54.6,4.05 !RESET.1 | v77.1,58.2 78.8,58.2 80.3,56.7 80.3,52.3 80.2,47.6 78.6,46 v73.6,46
!WP
  Top 0.2: U3.3 92.58,47.3 R3.1 93.3,47.2 !WP.1
BYPASS
  Top 0.5: C37.2 U6.4
DC_OUT
  Top 0.343: CF2.CENTER 70.09,90.84 U$22.OUT
DIO0
  Top 0.2: U1.49 70.25,55.55 63.8,49.1 DIO0.1
DIO1
  Top 0.2: U1.50 70.25,55.05 63.4,48.2 60.5,48.2 DIO1.1
DIO2
  Top 0.2: U1.51 70.25,54.55 63.5,47.8 58.8,47.8 DIO2.1
DIO3
  Top 0.2: U1.52 70.25,54.05 63.6,47.4 57.1,47.4 DIO3.1
DIO4
  Top 0.2: U1.53 70.25,53.55 65.6,48.8 63.8,47 55.4,47 DIO4.1
DIO5/CLKOUT
  Top 0.16: U1.54 72.65,53.05 73.65,52.05 U1.15
  Top 0.2: U1.15 81.15,52.05
  Top 0.25: 81.15,52.05 DIO5/CLKOUT.1
FWD
  Top 0.2: U$22.FWD 68.9,87.3 68.1,88.1 67.05,88.1 R19.2 D2.A
GND  (via drill 0.25)
  Top 0.2: U1.20 78.45,54.55 77.7,53.8 | v77.6,53.8 U1.PGND2
  other vias: 56.7,58.3 56.8,54.1 56,54.1 57.6,54.1 53.3,54.5 65.8,53.4 68.8,58.7 72.6,49.4 71.5,48.3 70,48.2 81.9,50 80.8,48.7 81.9,47.4 85.4,55.4 84.3,56.4 82.8,56.4 81.7,55.4 77.5,54.9 78.7,54.9 76.4,54.1 76.4,52.7 78.7,52.7 73.4,50.5 74.2,50.5
  pour Bottom (isolate 0.2, rank 6): 0,0 0,98 44.5,98 44.5,60 72.2,60 72.2,54.4 77.2,54.4 77.2,60 99,60 99,0
  pour Top (isolate 0.2, rank 6): 0,0 0,98 44.5,98 44.5,60 99,60 99,0
  pour Route2 (isolate 0.2, rank 6): 0,0 0,98 44.5,98 44.5,60 72.2,60 72.2,54.4 77.2,54.4 77.2,60 99,60 99,0
  pour Route15 (isolate 0.2, rank 6): 0,0 0,98 44.5,98 44.5,60 72.2,60 72.2,54.4 77.2,54.4 77.2,60 99,60 99,0
LDO_EN
  Top 0.2: 55.75,55.43 U4.3 55.4,55.4 55,55.8 R5.1 LDO_EN.1
LNA_EN  (via drill 0.25)
  Top 0.2: C48.2 v86.2,66.9 | U1.17 80.45,53.05 80.9,52.6 v83.5,52.6 | U6.3 86.15,74.65 86.3,74.5 v86.3,73.9
  Bottom 0.2: v86.3,73.9 v86.2,66.9 84,64.7 84,59.2 83.5,58.7 v83.5,52.6
LNA_IN
  Top 0.343: U$49.RF2 C23.2
LNA_OUT
  Top 0.343: C12.2 L6.2 C25.1
MISO
  Top 0.2: U1.29 80.08,59.18 80.4,59.5 87.1,59.5 89.2,57.4 89.2,52.8 91.33,50.67 U3.2 91.33,45.92 MISO.1
MOSI
  Top 0.2: 93.88,53.63 U3.5 93.86,56.6 | 78.35,59.65 78.6,59.9 91.4,59.9 93.86,57.44 93.86,56.6 | MOSI.1 93.86,56.6
  Top 0.25: U1.31 78.35,59.65
N$1  (via drill 0.25)
  Top 0.2: v82.6,35 v70,35 | v70,6 LED3.A
  Bottom 0.2: R13.1 82.8,35.2 v82.6,35 | v70,35 v70,6
N$2
  Top 0.406: U8.4 82.35,78.85 R1.1
N$3  (via drill 0.25)
  Top 0.2: LED2.A v67,6 | v67,35.7 v86.8,35.7
  Bottom 0.2: v67,6 v67,35.7 | v86.8,35.7 R14.1
N$4  (via drill 0.25)
  Top 0.2: U7.4 v46.94,76.9
  Bottom 0.2: v46.94,76.9 46.9,73.4 PG.1
N$5
  Bottom 0.2: TP1.1 23.1,3.65 CM2.9
N$6
  Top 0.4: U7.6 48.85,75.85 C13.2 48.8,74.5 R16.1
N$7
  Top 0.343: U8.6 83.84,82.05 L8.1 | C25.2 L8.1 | L8.1
N$8
  Top 0.2: Y1.3 67.39,55.99 67.96,55.99 68.52,56.55 U1.47
  Top 0.3: Y1.3 67.41,55.99 C35.2
N$9
  Top 0.6: U6.1 83.85,73.05 C36.2 R17.1
N$10
  Top 0.343: C5.2 L3.1 C7.1
N$12
  Top 0.2: R5.2 55,59 55.2,59.2 57.1,59.2 57.5,58.8 57.5,57.7 58.1,57.1 C39.2
  pour Top (no thermals): 57.5,55 57.5,57.8 59.6,57.8 59.6,55
N$13
  Top 0.4: C40.2 55.85,52.9 U4.4
N$14
  Top 0.2: R4.1 LED1.A
N$15
  Top 0.2: R9.1 LED5.A
N$16
  Top 0.343: C7.2 L3.2 | L3.2 C9.2 | L3.2 L5.1
N$17
  Top 0.343: L5.2 C14.2 C11.2
N$18
  Top 0.343: C6.2 L4.1 C8.1
N$19
  Top 0.343: L6.1 91.2,82 arc-90 C10.2 C8.2 L4.2
N$20
  Top 0.2: R10.1 LED6.A
N$21
  Top 0.2: R11.1 LED7.A
N$22
  Top 0.2: R8.1 LED4.A
N$23
  Top 0.2: R12.1 LED8.A
N$24
  Top 0.2: D1.C C49.1 74.5,93.45 R20.2
N$25
  Top 0.343: U8.3 75.25,80.75 C23.1
N$28
  Top 0.2: D2.C C57.1 66.2,93.25 R21.2
N$31
  Top 0.25: U1.44 71.25,58.05 70.9,58.4 C32.2
N$34
  Top 0.25: U1.45 71.15,57.55 69.4,59.3 C33.2
N$43
  Top 0.343: C14.1 57.2,66.3 arc-90 55.8,67.7 55.8,70.4 arc90 54.7,71.5 54.1,71.5 arc-90 52.7,72.9 52.7,76.8 arc-90 53.7,77.8 U2.2
PA_BOOST
  Top 0.25: U1.41 73.35,59.75
  Top 0.343: 73.35,59.75 73.35,61.55 73.34,61.76 70.3,64.8 L1.2 68.9,64.9 C5.1 C2.1
PA_EN  (via drill 0.25)
  Top 0.2: U7.5 v47.89,76.9 | U1.18 80.85,53.55 v81.1,53.3
  Bottom 0.2: v47.89,76.9 47.89,73.81 52.3,69.4 71,69.4 77.7,62.7 77.7,59.9 81.1,56.5 v81.1,53.3
PA_IN
  Top 0.343: C58.2 U$49.RF1
PTA4/NMI_B  (via drill 0.25)
  Top 0.2: U1.12 78.35,46.85 73.5,42 42.1,42 v42.1,43.3 | v42.1,86.7 42.1,88.92 CF1.P$2
  Bottom 0.2: v42.1,43.3 v42.1,86.7
PTC1  (via drill 0.25)
  Top 0.2: U1.24 80.86,56.55 81.8,57.5 85.5,57.5 87.6,55.4 87.6,40.2 85.2,37.8 v75,37.8 v40.6,37.8 | v75,9 R9.2
  Bottom 0.2: v75,9 v75,37.8 | v40.6,37.8 40.6,8.4 38.29,6.09 CM2.3
PTC2  (via drill 0.25)
  Top 0.2: U1.25 80.75,57.05 81.6,57.9 85.7,57.9 88,55.6 88,39.5 85.6,37.1 v78,37.1 v35.7,37.1 | v78,9 R10.2
  Bottom 0.2: v78,9 v78,37.1 | v35.7,37.1 35.7,6.3 35.75,6.25 CM2.4
PTC3  (via drill 0.25)
  Top 0.2: v32.9,36.4 v39.9,36.4 v81,36.4 86.1,36.4 88.4,38.7 88.4,55.8 85.9,58.3 81.4,58.3 80.67,57.56 79.98,57.56 U1.26 | v81,9 R11.2
  Bottom 0.2: v81,9 v81,36.4 | v32.9,36.4 32.9,6.3 33.21,5.99 CM2.5
PTC4  (via drill 0.25)
  Top 0.2: v30.8,38.5 v84,38.5 84.7,38.5 87.2,41 87.2,55.2 85.3,57.1 82,57.1 80.95,56.05 U1.23 | v84,9 R12.2
  Bottom 0.2: v84,38.5 v84,9 | v30.8,38.5 30.8,6.3 30.67,6.17 CM2.6
PTE19  (via drill 0.25)
  Top 0.2: U1.8 76.35,48.45 v74.6,46.7 | v66.2,44.8 66,44.7 v25.6,44.7
  Bottom 0.2: v74.6,46.7 66.2,46.7 v66.2,44.8 | v25.6,44.7 CM2.8
PTE30  (via drill 0.25)
  Top 0.2: v28,44.1 72.8,44.1 76.85,48.15 U1.9
  Bottom 0.2: CM2.7 28.13,6.17 28,6.3 v28,44.1
REV
  Top 0.2: U$22.REV 73.27,89.3 D1.A R18.2
RF_GND  (via drill 0.25, 0.25 pad 0.24)
  Top 0.2: U8.5 U8.2 79.9,81.4 79.8,81.5 | 73.85,62.4 73.8,62.4 | U$49.GND4 U$49.GND3 72.2,81.7 | U$49.GND9 U$49.GND10 72.2,81.7 | 72.2,81.7 U$49.PADDLE | U$49.GND5 v71.5,79
  Top 0.25: 73.85,57.85 U1.40 73.85,62.4 | 74.85,57.65 U1.38 74.85,61.45 75.4,62 | 75.85,58.05 U1.36 75.85,59.95 75.8,60
  Top 0.343: 75.85,58.05 v75.6,57.8 | v75.6,57.8 U1.PGND1 | 74.85,57.65 75.45,57.65 arc90 v75.6,57.8
  Top 0.4: C21.1 58.9,84.6 SH2.P$5
  other vias: 46,70.5 46,72.5 46,74.5 52,61.5 60,90 59,92 64,89 62,89 85,92 84.5,90 80,89 78,89 76,89 82,89 94.6,82.3 94.6,80.3 94.6,78.3 94.6,86.3 94.6,84.3 94.6,70.8 94.6,68.8 94.6,72.8 91.4,68.3 89.4,68.3 87.7,68.3 93.4,68.3 49.3,69.3 54.8,68.5 52.3,68.3 50.3,68.3 80.8,68.3 78.8,68.3 76.8,68.3 75.7,78.9 75.7,76.9 68.3,71.9 68.3,75.9 68.2,79.7 68.3,77.9 68.2,81.7 68.3,83.9 76.1,81.4 75.7,85.9 76,84.6 53.4,87.4 49.7,87.35 56.4,87.4 54.4,87.4 52.4,87.4 51.1,87.4 64.4,87.4 62.4,87.4 60.4,87.4 58.4,87.4 86.6,87.3 84.6,87.3 82.6,87.3 80.6,87.3 92.6,87.3 90.6,87.3 88.6,87.3 78.5,87.3 76.5,87.3 46,66.5 46,68.5 54,61.5 68,61.5 46,86 46,88 46,64.5 56,61.5 58,61.5 63.8,61.8 74.7,56.8 73.6,57.8 59.9,77.8 60.2,79.1 58.9,78.8 57.6,79.1 57.9,77.8 58.9,76.8 60.2,76.5 57.6,76.5 58.9,77.8 61,77.8 56.8,77.8 58.9,75.7 58.9,79.9 87.5,72.5 84.8,76.1 85.5,76.1 84.1,76.1 87.3,74.8 82.5,75.3 78.2,81.7 47.9,79 48.7,79 47.1,79 60,61.5 62,61.5 90,61.5 92,61.5 94,61.5 96,61.5 98,62.5 98,64.5 98,66.5 98,68.5 98,70.5 98,72.5 98,74.5 98,76.5 98,78.5 98,80.5 98,82.5 98,85 46,92 46,90 46,81 46,79 46,77 46,84 91,94 93,94 96,89 97,87 79.6,63.2 85.5,61.5 81,61.5 85.4,68.3 83.6,68.4 94.6,75.8 75.9,70.8 68,68.7 63.1,68.5 61,68.5 56.8,68.6 49.65,86.05 75.9,73.6 61.3,79.9 61.3,75.7 56.5,75.7 56.5,79.9 59.9,71 54.5,72.5 53.7,76.8 53.4,78.7 51.7,75.1 51.9,72.1 53.1,70.8 56.6,65.4 57.3,67.3 59.1,65.3 62.1,65.3 64.2,63.5 67.3,64.8 62.1,67.3 66.9,67.8 68.9,70.5 72.2,64.2 70.1,62.4 53.7,75.1 63.9,80.6 63.8,75.9 60.6,72.9 65,77.4 63.6,78.9 65.6,79.2 65.8,81.7 74.2,71.7 74.2,67.9 76.1,83.15 68.3,82.75 78.3,72.2 88.3,78.4 88.3,80.6 86.1,83.1 83.9,83.2 89.8,84.6 91.3,84.5 92.3,81.1 91.4,74 88.8,74 89.7,72 78.2,79.75 78.4,84.5 63.9,84.5 63.9,83 54.2,82.9 54.2,84.4 46,82 46.2,75.8 65.8,70.9 51.9,84.7 63.6,72.9 65.9,84.8 78.15,76.3 92.1,70.8 81.3,84.1 83.1,79.6 73.2,63.4 76.3,62.6 75.7,65.7 78.6,65.9 80,66.9 81.1,64.5 82.1,65.5 83.5,66.8 88,70.3 83.9,72 75.6,55.8 73.6,55.8 76.4,61.2 50,61.5 48,61.5 46,61.5 64.6,62.8 69.9,68.7 79.6,79.8 81.4,81.4 79.5,82 80.4,82.9 88.1,84.8 86.4,80.6 92.1,77.7 92.2,76.1 88.6,76 51.95,77.7 66,74.8 62.05,70.9 55.2,66.4 60.9,63.3 54.85,64.25 52.2,66.45 49.95,64.25 88.8,65.1 85.2,64.35 86.15,65.95 93.5,65.1 92.25,90.75 88.15,90.9 55.1,91.5 49.25,91.4 52.2,82.2 85.4,72 72.2,81.4
  pour Top (isolate 0.15, rank 3): 45.5,98 99,98 99,61 76.2,61 76.2,55.4 73.2,55.4 73.2,61 45.5,61
  pour Bottom (isolate 0.2, rank 3): 45.5,98 99,98 99,61 76.2,61 76.2,55.4 73.2,55.4 73.2,61 45.5,61
  pour Route2 (isolate 0.2, rank 3): 45.5,98 99,98 99,61 76.2,61 76.2,55.4 73.2,55.4 73.2,61 45.5,61
  pour Route15 (isolate 0.5, rank 6): 45.5,98 99,98 99,61 45.5,61
RF_RESET  (via drill 0.25)
  Top 0.2: U1.5 74.85,50.05 73.3,48.7 RF-RESET.1 | v69,55.7 69.35,56.05 U1.48
  Bottom 0.2: v69,55.7 69,55.1 72.4,51.7 74.4,51.7 74.8,51.1 74.8,50.1 73.3,48.8 RF-RESET.1
RFC
  Top 0.343: C61.2 U$22.IN
RFIO
  Top 0.25: U1.39 74.35,59.8
  Top 0.343: C4.1 C6.1 89.8,73.4 87.5,71.1 L2.2 83.1,70.7 82.6,70.2 82.6,67.3 79.4,64.1 76.4,64.1 74.35,61.95 74.35,59.8
RFOUT
  Top 0.343: C58.1 65.7,80.7 arc90 64.6,79.6 64.6,78.7 arc-90 63.7,77.8 U2.8
RXTX  (via drill 0.25)
  Top 0.2: v72.7,66.3 72.7,68 71.9,68.8 71.9,76 v72.7,76.8 | U$49.VC C60.2 75.15,81.5 v74.8,81.5
  Top 0.25: U1.37 75.35,60.75 v75.5,61.2
  Bottom 0.2: v75.5,61.2 75.5,63.5 v72.7,66.3 | v72.7,76.8 74.1,78.2 74.8,78.2 v74.8,81.5
RXTX_OUT
  Top 0.343: C61.1 U$49.RFC
SCLK  (via drill 0.25)
  Top 0.2: U1.28 80.45,58.55 81,59.1 86.6,59.1 v87.4,58.3 | SCLK.1 91.7,58.3 92.6,57.4 U3.6
  Bottom 0.2: v87.4,58.3 SCLK.1
SWD_CLK  (via drill 0.25)
  Top 0.2: v50.8,43.4 72.8,43.4 77.35,47.95 U1.10
  Bottom 0.2: CM1.4 v50.8,43.4
SWD_DIO  (via drill 0.25)
  Top 0.2: v49.5,42.7 73.5,42.7 77.85,47.05 U1.11
  Bottom 0.2: CM1.2 49.53,4.07 49.5,4.1 v49.5,42.7
UART0_RX  (via drill 0.25)
  Top 0.2: v18.2,40.6 v20.3,40.6 74.2,40.6 79.35,45.75 U1.14 | v18.2,72.3 31.97,86.07 CF1.P$18
  Bottom 0.2: CF1.P$17 CF1.P$18 | v20.3,40.6 20.3,6.3 20.51,6.09 CM2.10 | v18.2,72.3 v18.2,40.6
UART0_TX  (via drill 0.25)
  Top 0.2: v19.6,41.3 73.5,41.3 78.85,46.65 U1.13 | v19.6,72.3 33.24,85.94 CF1.P$16
  Bottom 0.2: CF1.P$15 CF1.P$16 | v19.6,72.3 v19.6,41.3 19.6,7.7 17.97,6.07 CM2.11
V+  (via drill 0.25)
  Top 0.2: R4.2 v61,9 45.3,9 43.37,7.07 CM2.1
  Top 0.5: C54.2 v66.5,61.8
  Route15 0.406: v21.9,86.2 22,86.2
  Bottom 0.2: v64.3,56.04 64.2,12.62 64.2,12.2 v61,9
  other vias: 60.7,56.8 61.6,56.8 60.8,54.4 61.6,54.4 21.9,87 21.9,85.4 61.6,56 61.6,55.2 47.5,71.8 49.1,71.8 48.3,71.8 47.5,72.8 80,72.7 80,73.4 79.3,73.4 79.3,72.7
  pour Route15 (isolate 0.2, no thermals): 20,96 20,83.1 44.8,55.3 44.8,55.1 69.3,55.1 71.5,57.5 71.5,68 86,68 86,80 48,80 48,68 66,68 66,60 44.5,60 22.5,85 22.5,96
  pour Top (no thermals): 60.3,54.1 60.3,57.1 61.9,57.1 61.9,54.1
  pour Top (isolate 0.2, no thermals): 22.5,85 22.5,96 20,96 20,85
  pour Top (no thermals): 49.4,73.3 47.1,73.3 47.1,71.4 49.4,71.4
  pour Top (no thermals): 81.4,73.8 79,73.8 79,72.4 81.4,72.4
V_LNA_FILTERED  (via drill 0.25)
  Top 0.2: C51.2 v86.8,62.2 | R6.1 v79.8,78.8 C47.2
  Bottom 0.2: R14.2 v86.8,62.2 86.8,74.4 86.6,74.6 81.6,74.6 80.8,75.4 80.8,77.8 v79.8,78.8
V_PA_FILTERED  (via drill 0.25)
  Top 0.2: C45.2 R7.1 v48.5,85.95 | C50.2 v82.8,62.2
  Bottom 0.2: v48.5,85.95 48.5,81.3 50.4,79.4 50.4,71.8 52.4,69.8 80.2,69.8 82.8,67.2 v82.8,62.2 R13.2
VBIAS  (via drill 0.25)
  Top 0.2: C24.1 | 74.2,75 C43.+
  Top 0.3: v69.4,82.2 U$49.VDD
  Top 0.4: C38.2 86.56,79.51 | 83.65,77.2 83.65,77.25 83.8,77.4 U6.5 | 84.85,78.8 84.8,78.8
  Top 0.5: 86.56,79.51 C24.1 85.4,79.1 85.1,78.8 84.8,78.8 R1.2 | 74.2,75 74.2,76.7 72.8,78.1 69.4,78.1 v69.4,79.7
  Top 0.6: C43.+ 79,74.8 80.8,76.6 R6.2 C44.1 83.65,77.2 | U6.5 83.85,78.75 R1.2 L8.2
  Bottom 0.5: v69.4,79.7 v69.4,82.2
VFWD  (via drill 0.25)
  Top 0.2: U1.6 75.35,49.75 v74.7,49 | v71.1,67.6 71.1,75.8 v70.3,76.6 | v65.3,92.2 65.25,92.25 R21.1 64.45,93.3 C56.1
  Bottom 0.2: v71.1,67.6 71.1,61.7 70.6,61.2 70.6,58.8 71,58.4 71,53.7 72.6,52.1 74.6,52.1 75.4,51.1 75.4,50 v74.7,49 | v70.3,76.6 70.3,78.7 70.6,79 70.6,82.2 69.9,82.9 69.9,87.6 v65.3,92.2
VPA  (via drill 0.25)
  Top 0.2: R7.2 C46.2
  Top 0.5: 48.5,81.75 C46.2
  other vias: 56.2,74.4 55.4,74.4 55.4,73.6 56.2,73.6 56.1,81.1 55.3,81.1 54.5,81.1
  pour Top (isolate 0.2, rank 2, no thermals): 61.6,80.7 61.6,85 60.8,85 60.8,83.5 57.3,83.5 57.3,84.9 56.4,84.9 56.4,81.4 49.9,81.4 49.9,82.3 47.8,82.3 47.8,80.2 53.5,80.2 54,80.7
  pour Top (no thermals): 59.45,72 56.5,72 55.1,72.8 55.1,74.65 57.7,74.65 57.7,73.05 59.45,73.05
  pour Bottom: 56.7,73.1 56.7,74.6 55.8,75.5 55.8,80.1 56.5,80.8 56.5,81.7 54.1,81.7 54.1,73.1
VR_PA  (via drill 0.25)
  Top 0.25: U1.42 72.85,60.85 v72.35,61.35
  Top 0.3: L2.1 81.5,67.4 79.3,65.1 76.1,65.1 v74.2,63.2
  Top 0.343: C1.2 L2.1 | C3.1 68.7,63.3 L1.1 70.7,63.2 72.1,61.8 72.1,61.6 v72.35,61.35
  Bottom 0.3: v72.35,61.35 v74.2,63.2
VREV  (via drill 0.25)
  Top 0.2: U1.7 75.85,49.15 v74.8,48.1 | v71.9,66.9 71.9,68.2 71.5,68.6 v71.5,76.6 | v75.4,92.2 75.45,92.25 R20.1 76.25,93.5 C55.1
  Bottom 0.2: v71.9,66.9 71.5,66.5 71.5,61.5 71,61 71,58.9 71.4,58.5 71.4,53.9 72.8,52.5 74.9,52.5 75.8,51.3 75.8,49.1 74.9,48.3 v74.8,48.1 | v71.5,76.6 71.5,78 73.2,79.7 73.2,81.9 74.3,83 74.3,91.1 v75.4,92.2
XTA
  Top 0.2: U1.46 68.26,57.05 68,56.79 66.59,56.79 66.16,57.21 Y1.1 66.1,57.7 XTAL.1
  Top 0.3: Y1.1 66.13,57.64 C34.2

## Text on the board
tPlace: Portland State Aerospace Society / Oresat Low-Gain-Radio v1.2 / 2016/09/28 / James Heath, Will Harrington, Andrew Greenberg | GND | TX | RX | C7 | C6 | C5 | C4 | C3 | C2 | C1 | 3.3 | V+ | V+ | 3.3 | LNA | PA | C1 | C2 | C3 | C4